# Altium PCB 电源.PcbDoc
Units mil, origin at the board's own origin, x right, y up, seen from the top; angles counter-clockwise.
Board outline 6000 x 4000 mil, 2 copper layers (Top Layer, Bottom Layer); 43 components, 19 nets, 149 pads, 0 vias.
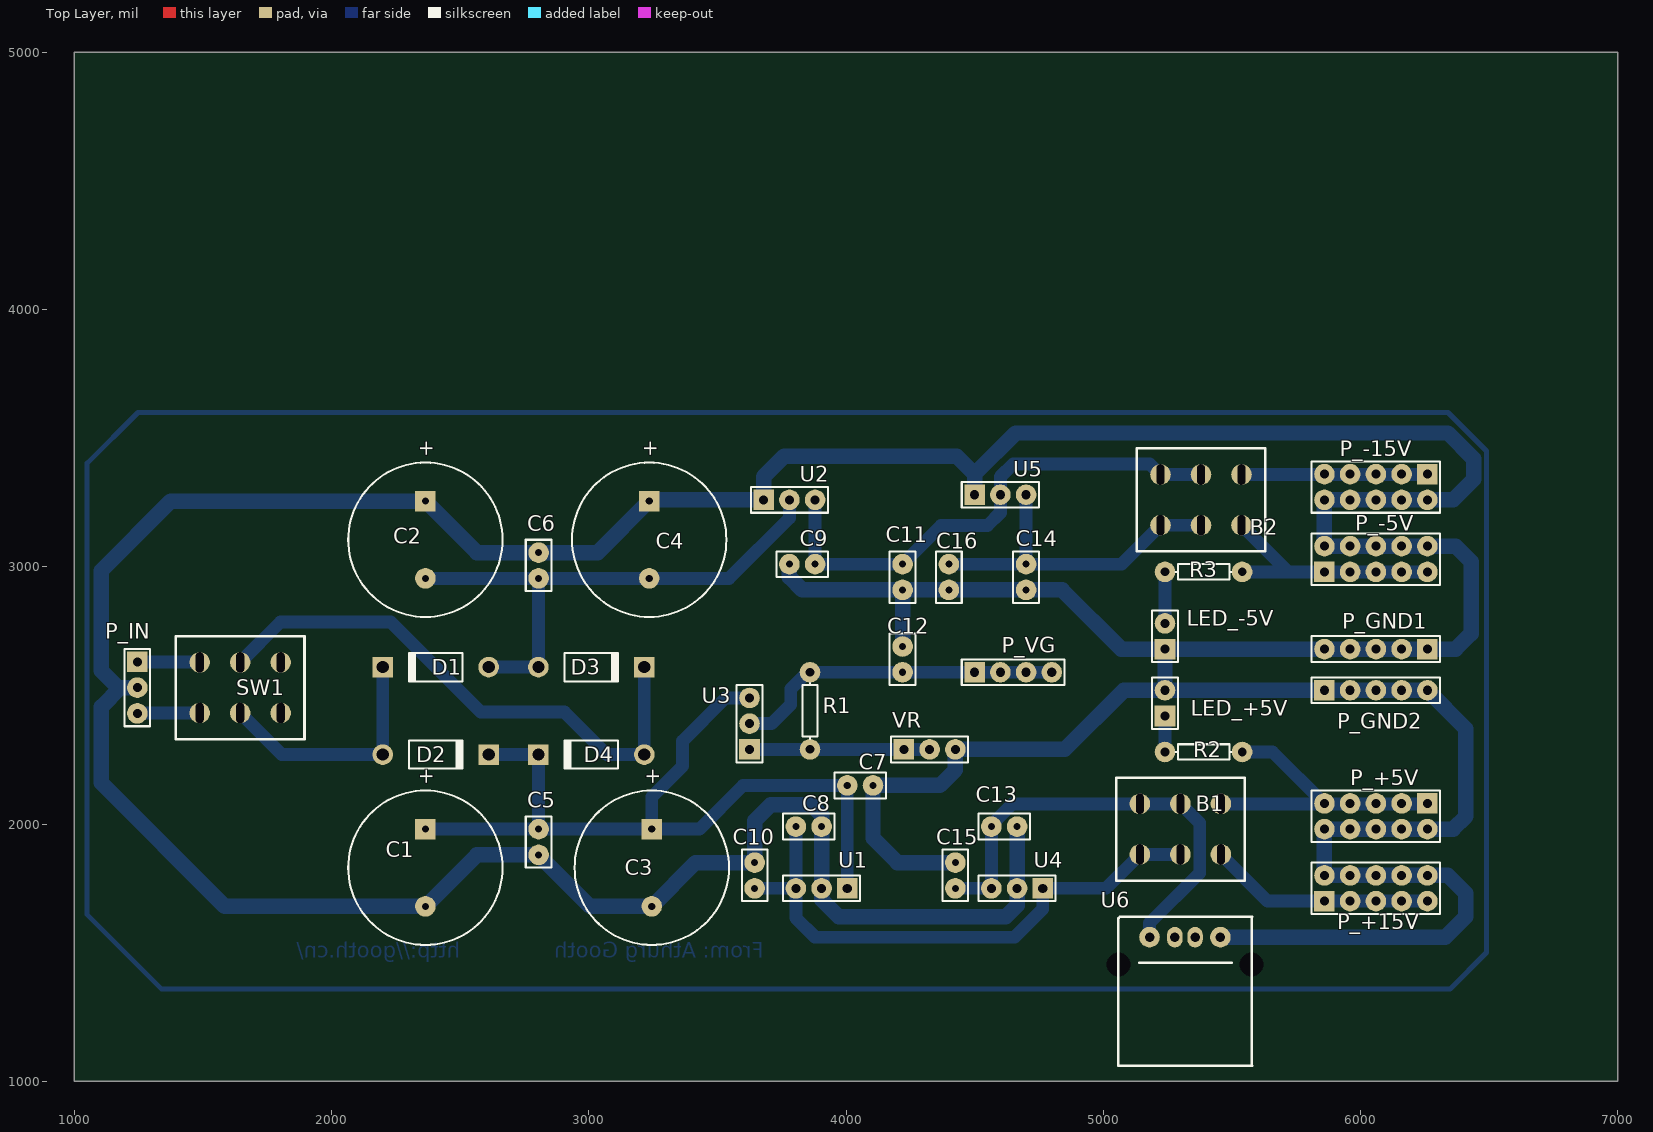
[diagram p0: Top Layer view]
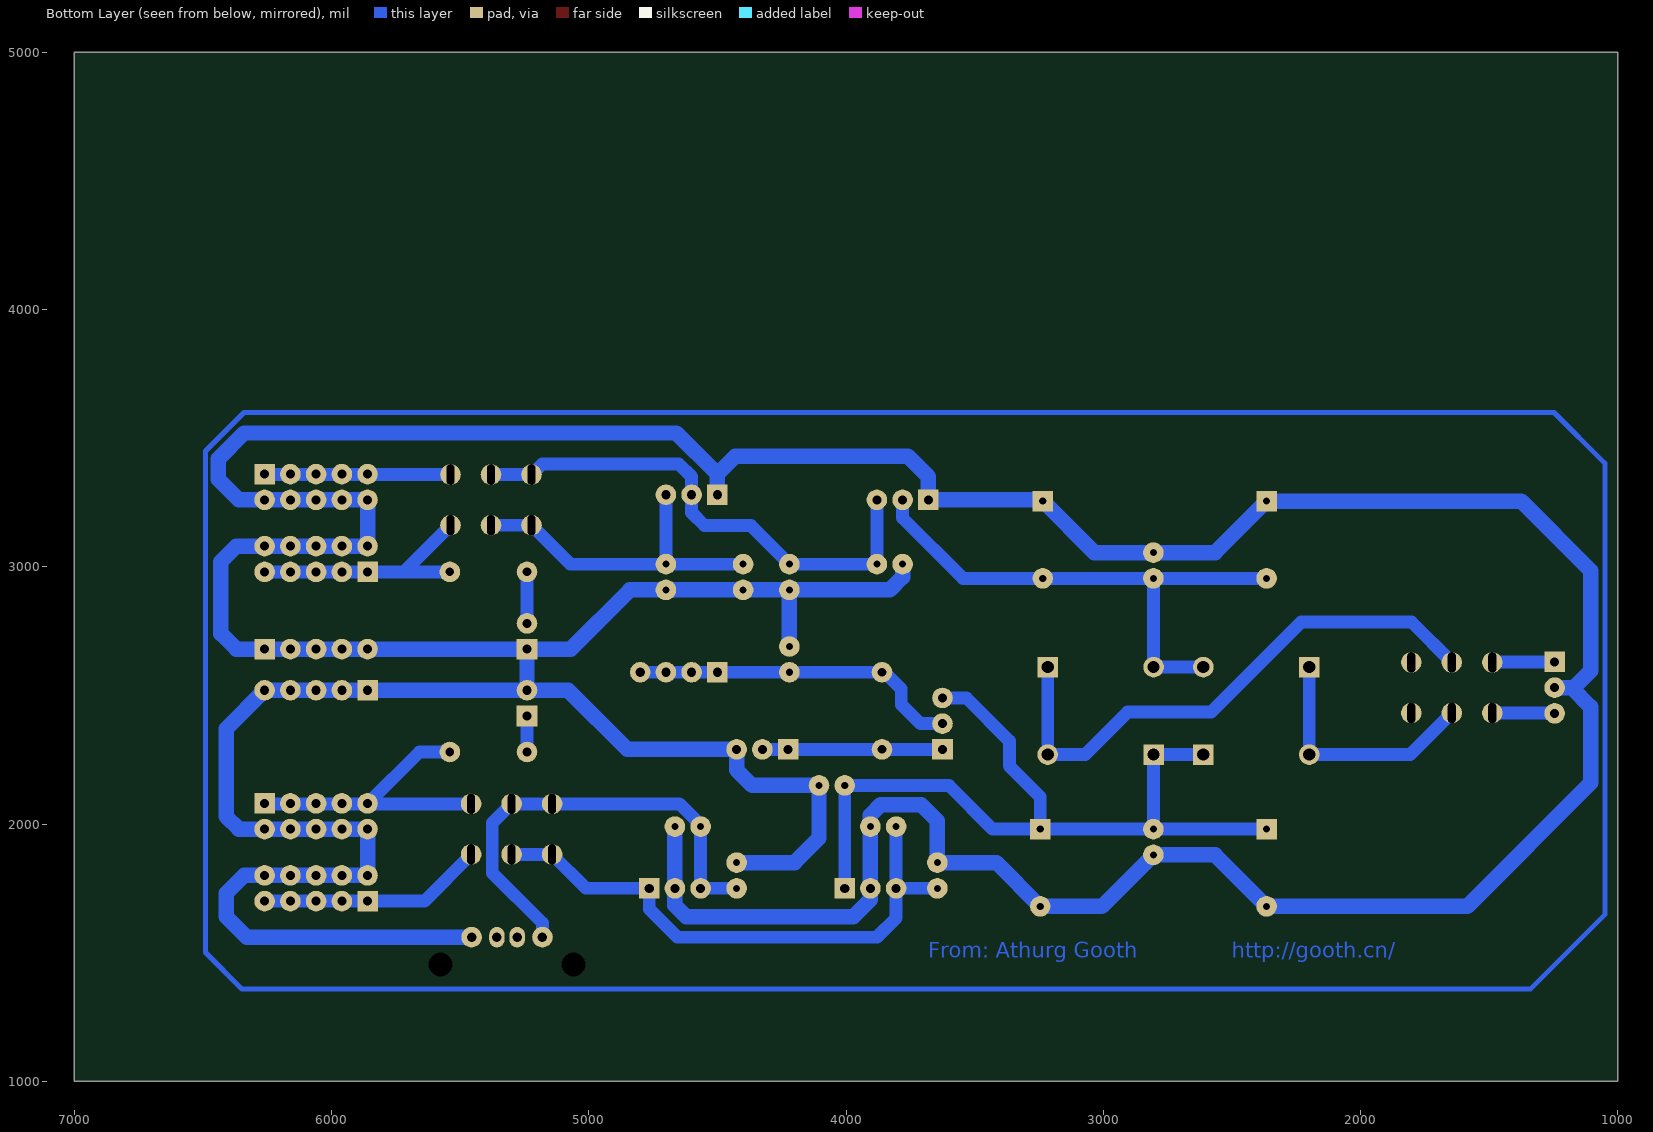
[diagram p1: Bottom Layer view, seen from below]

## Layer stack, top to bottom
Top Layer: signal copper 1.4
Dielectric: dielectric 12.6, FR-4, Dk 4.8
Bottom Layer: signal copper 1.4

## Board outline
1000,1000 7000,1000 7000,5000 1000,5000

## Design rules (kind name [scope] priority, off if disabled: settings)
Clearance [All] p1: gap=10
PolygonConnect [All] p1: connectstyle=Relief reliefconductorwidth=10 reliefentries=4 polygonreliefangle="90 Angle"
RoomDefinition 电源 [InComponentClass('电源')] p1: confinementstyle=ConfineIn formatcopy=TRUE lockcomponents=FALSE outline 1000,1010 6650,1010 6650,3710 1000,3710
RoutingVias [All] p1: holewidth=28 width=50 viastyle="Through Hole" minholewidth=28 minwidth=50 maxholewidth=28 maxwidth=50
SilkscreenOverComponentPads [All] p1: minsilkscreentomaskgap=10
SolderMaskExpansion [All] p1: expansion=4
TestPointUsage [All] p1: valid=0 allowmultiple=FALSE
Testpoint [All] p1: side=15 testpointundercomponent=TRUE minsize=40 maxsize=100 preferedsize=60 minholesize=0 maxholesize=40 preferedholesize=32 testpointgrid=1 style=1023 order=0123456789
Width [All] p1: maxlimit=80 minlimit=10 preferedwidth=80
23 further rules are at their usual default settings.

## Components (designator, comment, footprint, x,y, rotation, side; value= is the part's Value field where it differs from the comment)
B1 "双刀双掷按钮" 双刀双掷开关 5300,1980 r90 top
B2 "双刀双掷按钮" 双刀双掷开关 5380,3260 r270 top
C1 "Cap Pol1" RB7.6-15 2365,1830 r90 top
C2 "Cap Pol1" RB7.6-15 2365,3105 r90 top
C3 "Cap Pol1" RB7.6-15 3245,1830 r90 top
C4 "Cap Pol1" RB7.6-15 3235,3105 r90 top
C5 "Cap" RAD-0.1 2805,1930 r90 top
C6 "Cap" RAD-0.1 2805,3005 r90 top
C7 "Cap" RAD-0.1 4055,2150 r0 top
C8 "Cap Pol1" RAD-0.1 3855,1990 r0 top
C9 "Cap Pol1" RAD-0.1 3830,3010 r0 top
C10 "Cap" RAD-0.1 3645,1800 r270 top
C11 "Cap" RAD-0.1 4220,2960 r270 top
C12 "Cap" RAD-0.1 4220,2640 r270 top
C13 "Cap Pol1" RAD-0.1 4615,1990 r0 top
C14 "Cap Pol1" RAD-0.1 4700,2960 r90 top
C15 "Cap" RAD-0.1 4425,1800 r270 top
C16 "Cap" RAD-0.1 4400,2960 r270 top
D1 "Diode" DO-41 2405,2610 r180 top
D2 "Diode" DO-41 2405,2270 r0 top
D3 "Diode" DO-41 3010,2610 r0 top
D4 "Diode" DO-41 3010,2270 r180 top
LED_+5V "LED1" HDR1X2 5240,2420 r90 top
LED_-5V "LED1" HDR1X2 5240,2680 r90 top
P_+5V "Header 5X2" HDR2X5 6260,2080 r180 top
P_+15V "Header 5X2" HDR2X5 5860,1700 r0 top
P_-5V "Header 5X2" HDR2X5 5860,2980 r0 top
P_-15V "Header 5X2" HDR2X5 6260,3360 r180 top
P_GND1 "Header 5" HDR1X5 6260,2680 r180 top
P_GND2 "Header 5" HDR1X5 5860,2520 r0 top
P_IN "Header 3" HDR1X3 1245,2630 r270 top
P_VG "Header 4" HDR1X4 4500,2590 r0 top
R1 "Res2" AXIAL-0.3 3860,2440 r270 top
R2 "Res Semi" AXIAL-0.3 5390,2280 r0 top
R3 "Res Semi" AXIAL-0.3 5390,2980 r0 top
SW1 "双刀双掷开关" 双刀双掷开关 1645,2530 r90 top
U1 "7815" HDR1X3 4005,1750 r180 top
U2 "7915" HDR1X3 3680,3260 r0 top
U3 "LM317" HDR1X3 3625,2290 r90 top
U4 "7805" HDR1X3 4765,1750 r180 top
U5 "7905" HDR1X3 4500,3280 r0 top
U6 "USB" USB-A 5180,1560 r180 top
VR "variable resister" HDR1X3 4225,2290 r0 top

## Footprints (in the part's own frame and the unit in brackets; to place one, negate y for a bottom-side part, rotate by r counter-clockwise, add the part's x,y. Pads: shape width x height; smd on the part's side, far side on the other; paste and mask are expansions set on the pad)
AXIAL-0.3 [mil] "Resistor; 2 Leads"
  round 80 hole 33.46: 1(-150,0) 2(150,0)
  silkscreen extent -109,-30 109,30
DO-41 [mil] "Diode, Axial; Body 5.2 x 2.7 mm (LxDia. max), Lead Dia. 0.86 mm (max)"
  round 80 hole 47.24: 1(-205.91,0)
  rect 80x80 hole 47.24: 2(205.91,0)
  silkscreen extent -104,-55 108,55
HDR1X2 [mil] "Connector; Header; 2 Position"
  rect 80x80 hole 35.43: 1(0,0)
  round 80 hole 35.43: 2(100,0)
  silkscreen extent -50,-50 150,50
HDR1X3 [mil] "Connector; Header; 3 Position"
  rect 80x80 hole 35.43: 1(0,0)
  round 80 hole 35.43: 2(100,0) 3(200,0)
  silkscreen extent -50,-50 250,50
HDR1X4 [mil] "Connector; Header; 4 Position"
  rect 80x80 hole 35.43: 1(0,0)
  round 80 hole 35.43: 2(100,0) 3(200,0) 4(300,0)
  silkscreen extent -50,-50 350,50
HDR1X5 [mil] "Connector; Header; 5 Position"
  rect 80x80 hole 35.43: 1(0,0)
  round 80 hole 35.43: 2(100,0) 3(200,0) 4(300,0) 5(400,0)
  silkscreen extent -50,-50 450,50
HDR2X5 [mil] "Connector; Header; 5x2 Position"
  rect 80x80 hole 35.43: 1(0,0)
  round 80 hole 35.43: 2(0,100) 3(100,0) 4(100,100) 5(200,0) 6(200,100) 7(300,0) 8(300,100) 9(400,0) 10(400,100)
  silkscreen extent -50,-50 450,150
RAD-0.1 [mil] "Indicating Instrument; 2 Leads"
  round 80 hole 27.56: 1(-50,0) 2(50,0)
  silkscreen extent -100,-50 100,50
RB7.6-15 [mil] "Polarized Capacitor (Radial); 2 Leads"
  rect 80x80 hole 27.56: 1(150,0)
  round 80 hole 27.56: 2(-150,0)
  silkscreen extent -300,-300 300,300
USB-A [mil] "扁头USB封装"
  round 80 hole 37: 1(0,0) 4(-275.6,0)
  oval 60x80 hole 37: 2(-98.5,0) 3(-177,0)
  round 80 hole 93: 5(-397,107) 6(121,107)
  silkscreen extent -400,-80 121,500
双刀双掷开关 [mil] "双刀双掷开关封装"
  round 80 hole 30 slot 78.74 at 0 deg: 1(-98.43,157.48) 2(-98.43,0) 3(-98.43,-157.48) 4(98.43,157.48) 5(98.43,0) 6(98.43,-157.48)
  silkscreen extent -200,-250 200,250

## Part data
C1 C2 C3 C4 C8 C9 C13 C14: "Polarized Capacitor (Radial)"
C5 C6 C7 C10 C11 C12 C15 C16: "Capacitor"
D1 D2 D3 D4: "Default Diode"
LED_+5V LED_-5V: "Typical RED GaAs LED"
P_+5V P_+15V P_-5V P_-15V: "Header, 5-Pin, Dual row"
P_GND1 P_GND2: "Header, 5-Pin"
P_IN: "Header, 3-Pin"
P_VG: "Header, 4-Pin"
R1: "Resistor"
R2 R3: "Semiconductor Resistor"
VR: library part 电位器

## Nets (pads, with @x,y where several pads share a name; then routed paths per layer and width w, separated by ;. In a path a pad name is that pad's centre, name@x,y a point inside that pad or via, vN(x,y) a via of type N, cw(c..) or ccw(c..) an arc to the next point about the centre after c; other vN are vias at no path point)
+5: B1.6 P_+5V.1 P_+5V.3 P_+5V.5 P_+5V.7 P_+5V.9 R2.2 | length 1206.7
  Bottom Layer w50: B1.6 P_+5V.9@5860,2078.43 ; R2.2 5658.43,2280 P_+5V.9@5860,2078.43 ; P_+5V.1 6258.43,2078.43 5960,2078.43 P_+5V.9@5860,2078.43
+15: B1.3 P_+15V.1 P_+15V.3 P_+15V.5 P_+15V.7 P_+15V.9 | length 877.7
  Bottom Layer w50: B1.3 5639.06,1700 P_+15V.1 P_+15V.3 P_+15V.5 P_+15V.7 P_+15V.9
-5: B2.4 P_-5V.1 P_-5V.3 P_-5V.5 P_-5V.7 P_-5V.9 R3.2 | length 976.8
  Bottom Layer w50: B2.4 5719.06,2980 ; R3.2 5719.06,2980 ; P_-5V.9 P_-5V.7 P_-5V.5 P_-5V.3 P_-5V.1 5719.06,2980
-15: B2.1 P_-15V.1 P_-15V.3 P_-15V.5 P_-15V.7 P_-15V.9 | length 723.2
  Bottom Layer w50: B2.1 6060,3358.43 6258.43,3358.43 P_-15V.1
GND: C1.2 C2.1 C3.2 C4.1 C5.1 C6.2 C7.2 C8.2 C9.1 C10.1 C11.2 C12.1 C13.2 C14.1 C15.1 C16.2 LED_+5V.2 LED_-5V.1 P_+5V.2 P_+5V.4 P_+5V.6 P_+5V.8 P_+5V.10 P_+15V.2 P_+15V.4 P_+15V.6 P_+15V.8 P_+15V.10 P_-5V.2 P_-5V.4 P_-5V.6 P_-5V.8 P_-5V.10 P_-15V.2 P_-15V.4 P_-15V.6 P_-15V.8 P_-15V.10 P_GND1.1 P_GND1.2 P_GND1.3 P_GND1.4 P_GND1.5 P_GND2.1 P_GND2.2 P_GND2.3 P_GND2.4 P_GND2.5 P_IN.2 U1.2 U2.1 U4.2 U5.1 U6.4 VR.3 | length 22665.9
  Bottom Layer w60: P_IN.2@1224.79,2530 1170,2530 1105,2595 1105,2985 1375,3255 C2.1 2565,3055 C6.2 3035,3055 C4.1 3240,3260 U2.1 3680,3350 3760,3430 4430,3430 4500,3360 ; P_IN.2 1180,2530 1105,2455 1105,2160 1585,1680 C1.2 2565,1880 C5.1 3005,1680 C3.2 3415,1850 C10.1 3645,2011.86 3703.14,2070 ; 3708.14,2075 3865,2075 3905,2035 C8.2 U1.2 3905,1706.36 3971.36,1640 4621.86,1640 4665,1683.14 U4.2 ; C9.1 3780,2960 3830,2910 C11.2 ; C12.1 C11.2 ; C16.2 C11.2 ; C16.2@4410.02,2910 4840,2910 5070,2680 LED_-5V.1 ; C15.1 4200,1850 4105,1945 C7.2 4365,2150 4425,2210 VR.3 4850,2290 5080,2520 LED_+5V.2 ; U5.1 4500,3360 ; U4.2@4661.13,1753.87 4661.13,1768.83 4665,1772.69 C13.2 ; U6.4 6330,1560 6410,1640 6410,1730 6340,1800 P_+15V.10 P_+15V.8 P_+15V.6 P_+15V.4 P_+15V.2 P_+5V.10 P_+5V.8 P_+5V.6 P_+5V.4 P_+5V.2 6360,1980 6410,2030 6410,2370 P_GND2.5 P_GND2.4 P_GND2.3 P_GND2.2 P_GND2.1 LED_+5V.2 ; 4500,3360 4660,3520 6340,3520 6440,3420 6440,3355 6440,3340 6360,3260 P_-15V.2 P_-15V.4 P_-15V.6 P_-15V.8 P_-15V.10 P_-5V.2 P_-5V.4 P_-5V.6 P_-5V.8 P_-5V.10 6370,3080 6430,3020 6430,2740 6370,2680 P_GND1.1 P_GND1.2 P_GND1.3 P_GND1.4 P_GND1.5 LED_-5V.1 ; LED_+5V.2 LED_-5V.1
NetB1_1: B1.1 B1.2 C8.1 C10.2 U1.3 U4.1 | length 2221.1
  Bottom Layer w50: C10.2 U1.3 ; C8.1 U1.3 ; B1.2 B1.1 5010.94,1750 U4.1 4765,1670 4655,1560 3880,1560 3805,1635 U1.3
NetB2_1: B2.5 B2.6 C14.2 C16.1 U5.3 | length 1312.8
  Bottom Layer w50: C16.1 C14.2 ; U5.3 C14.2 ; B2.5 B2.6 5070.94,3010 C14.2
NetB2_4: B2.2 B2.3 C9.2 C11.1 U2.3 U5.2 | length 2010.8
  Bottom Layer w50: U2.3 C9.2 C11.1 4370,3160 4550,3160 4600,3210 4600,3264.38 U5.2 4600,3350 4650,3400 5180.94,3400 B2.3 B2.2
NetC1_1: C1.1 C3.1 C5.2 C7.1 D2.2 D4.2 U1.1 U3.3 | length 3304.2
  Bottom Layer w50: C1.1 C5.2 ; D2.2 D4.2 2804.09,2000.91 2825,1980 C3.1 ; U3.3 3531.86,2490 3365,2323.14 3365,2225 3245,2105 C3.1 ; U1.1 C7.1 3600,2150 3430,1980 C3.1
NetC2_2: C2.2 C4.2 C6.1 D1.1 D3.1 U2.2 | length 2120.9
  Bottom Layer w50: C2.2 C6.1 ; D1.1 D3.1 2805,2610.91 C6.1 ; U2.2 3780,3190 3545,2955 C4.2 C6.1
NetD1_2: D1.2 D2.1 SW1.2 | length 961
  Bottom Layer w50: SW1.2 1806.57,2270 D2.1 D1.2
NetD3_2: D3.2 D4.1 SW1.5 | length 2189.1
  Bottom Layer w50: SW1.5 1801.57,2785 2230,2785 2580,2435 2905,2435 3070,2270 D4.1 D3.2
NetLED_+5V_1: LED_+5V.1 R2.1 | length 140
  Bottom Layer w50: R2.1 LED_+5V.1
NetLED_-5V_2: LED_-5V.2 R3.1 | length 200
  Bottom Layer w50: LED_-5V.2 R3.1
NetP_IN_1: P_IN.1 SW1.4 | length 243.2
  Bottom Layer w50: P_IN.1 1485.94,2630 SW1.4
NetP_IN_3: P_IN.3 SW1.1 | length 243.2
  Bottom Layer w50: P_IN.3 1246.57,2431.57 SW1.1
NetR1_2: R1.2 U3.1 VR.1 VR.2 | length 700
  Bottom Layer w50: U3.1 4005,2290 4165,2290 VR.2
USB_VCC: B1.4 B1.5 C13.1 C15.2 U4.3 U6.1 | length 1785.4
  Bottom Layer w50: C15.2 U4.3 C13.1 4565,1996.07 4647.36,2078.43 B1.4 B1.5 5375,2003.43 5375,1810 5180,1615 U6.1
VG: C12.2 P_VG.1 P_VG.2 P_VG.3 P_VG.4 R1.1 U3.2 | length 1293
  Bottom Layer w50: U3.2 3650,2390 3710,2390 3785,2465 3785,2525 3850,2590 3900,2590 C12.2 P_VG.1 P_VG.2 P_VG.3 P_VG.4
pads on no net: SW1.3 SW1.6 U6.2 U6.3 U6.5 U6.6
copper on no net: | length 14907.6
  Bottom Layer w20: 1050,1647.57 1050,1690 1050,3360 1050,3402.43 1247.57,3600 6340,3600 6490,3450 6490,1500 6348,1358 1339.57,1358 1050,1647.57

## Other copper
Bottom Layer:
  text "http://gooth.cn/" at 2500,1480 h60
  text "From: Athurg Gooth" at 3680,1480 h60

## Text inside footprints (layer, text, board x,y; h text height)
C1: Top Overlay "+" at 2394.01,2150.15 h59.06 r90
C2: Top Overlay "+" at 2394.01,3425.15 h59.06 r90
C3: Top Overlay "+" at 3274.01,2150.15 h59.06 r90
C4: Top Overlay "+" at 3264.01,3425.15 h59.06 r90